# EAGLE board GPSsd_small (EAGLE 9.6.2)
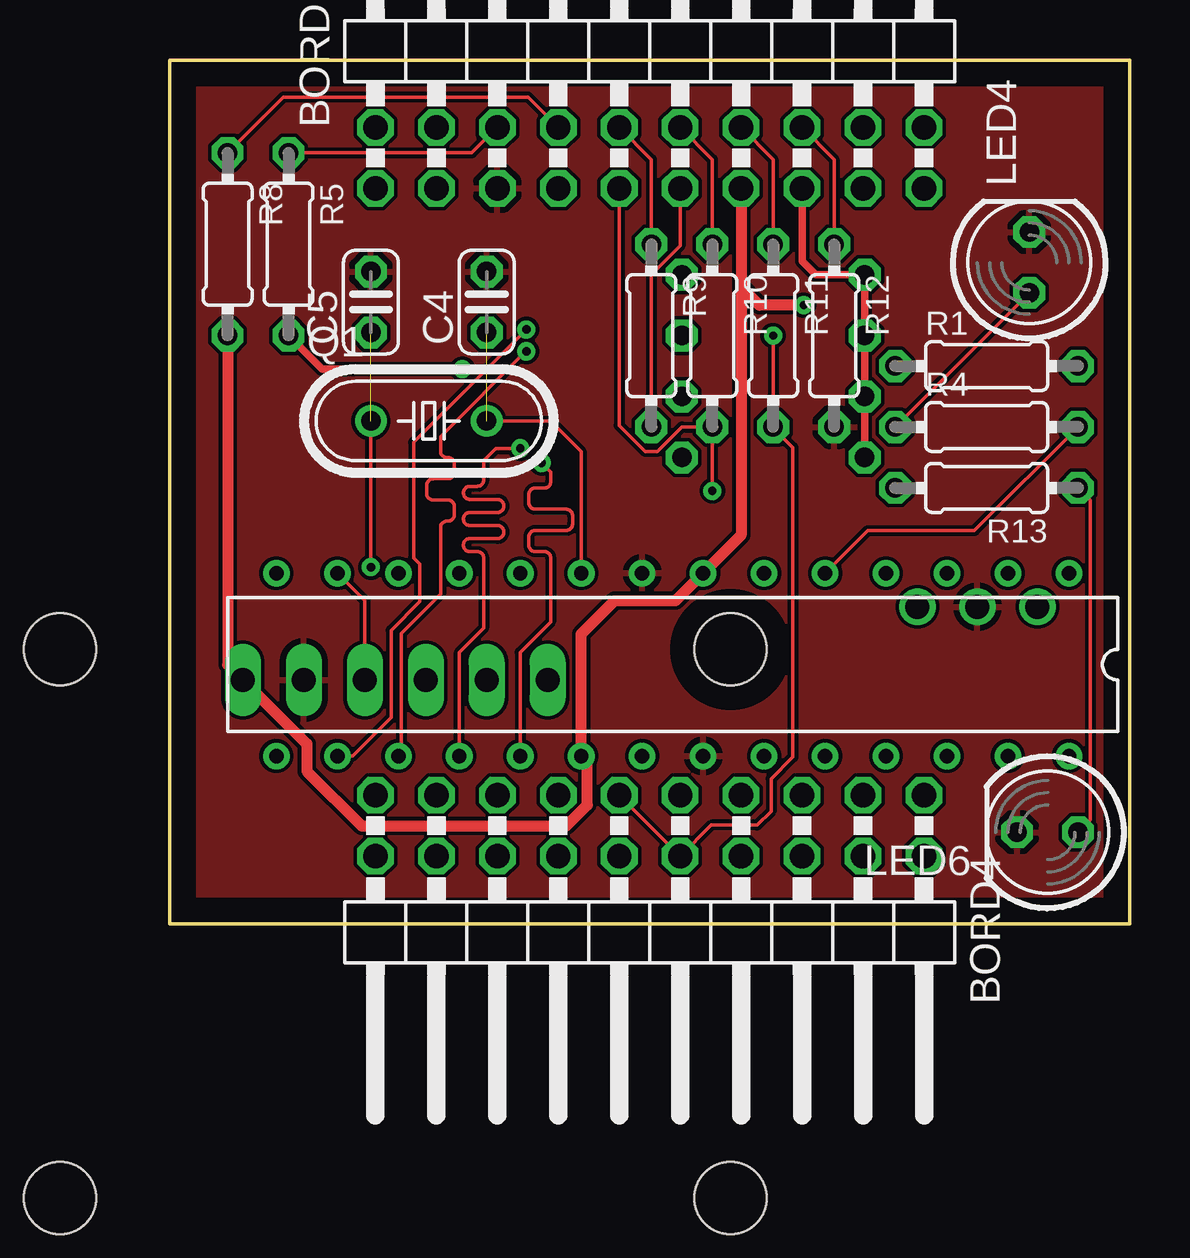
[diagram p0: board, top side]
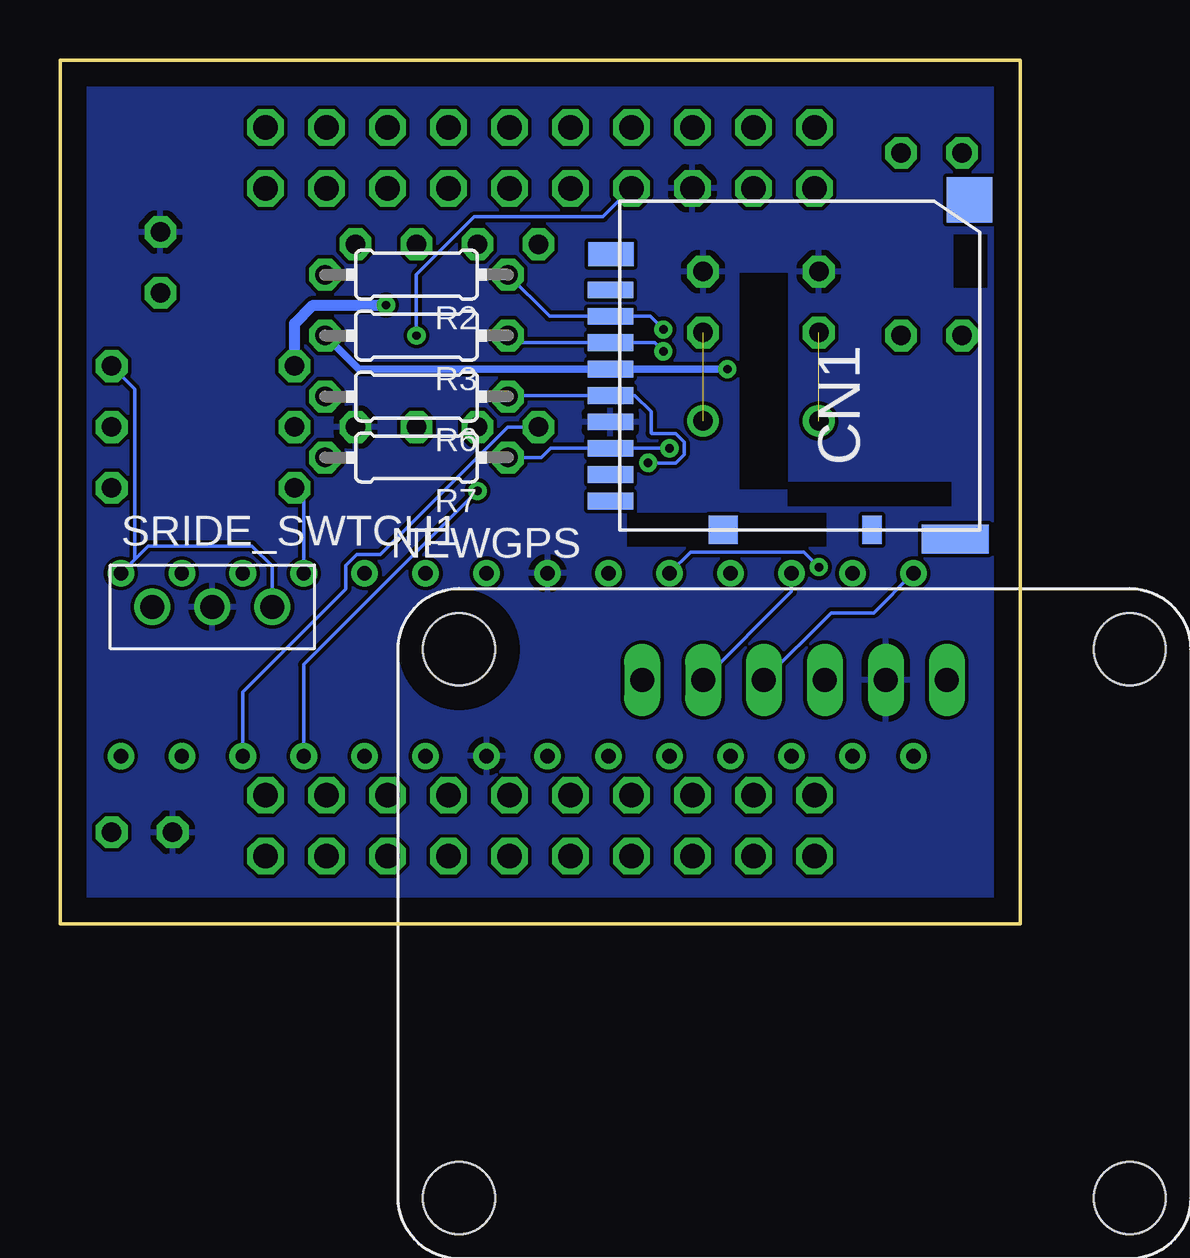
[diagram p1: board, bottom side, seen from below]

Size 40 x 36 mm. Coordinates in mm from the lower left corner, seen from the top.
Outline: 0,0 0,36 40,36 40,0 0,0
Copper layers (1*16): Top 0.035mm / dielectric 1.5mm / Bottom 0.035mm
Design rules "default": minimum track width 6mil, minimum drill 0.35mm, track to track 6mil, track to pad 6mil, pad to pad 6mil, via to via 6mil, smd to smd 6mil, copper to edge 40mil, drill to drill 6mil, minimum pad ring 10mil, minimum via ring 8mil, stop-mask expansion 4mil, vias tented up to drill 0mil, thermal gap 10mil
Net classes: 1 SIGNAL: width 0.152 mm, drill 0.152 mm, clearance 0.152 mm; 2 POWER_H: width 0.457 mm, drill 0.152 mm, clearance 0.152 mm; 3 POWER_L: width 0.305 mm, drill 0.152 mm, clearance 0.152 mm; 4 GND: width 0.305 mm, drill 0.152 mm, clearance 0.152 mm

## Footprints (pad centres in the part's own frame; a part is rotated, then mirrored left to right if it is on the bottom)
2X10/90 = drill 1.016 octagon: 1 -11.43,-6.35; 2 -11.43,-3.81; 3 -8.89,-6.35; 4 -8.89,-3.81; 5 -6.35,-6.35; 6 -6.35,-3.81; 7 -3.81,-6.35; 8 -3.81,-3.81; 9 -1.27,-6.35; 10 -1.27,-3.81; 11 1.27,-6.35; 12 1.27,-3.81; 13 3.81,-6.35; 14 3.81,-3.81; 15 6.35,-6.35; 16 6.35,-3.81; 17 8.89,-6.35; 18 8.89,-3.81; 19 11.43,-6.35; 20 11.43,-3.81
C025-024X044 = drill 0.813 octagon: 1 -1.27,0; 2 1.27,0
DM3AT = smd 0.7 x 1.9: CD/DAT3 2.2,6.4; CLK -1.1,6.4; CMD 1.1,6.4; DAT0 -3.3,6.4; DAT1 -4.4,6.4; DAT2 3.3,6.4; DET_B -5.5,6.4; VDD 0,6.4; VSS -2.2,6.4 | smd 1.2 x 0.8: DET_A -6.7,-4.5 | smd 1 x 1.9: P$9 4.8,6.381 | smd 1.2 x 1.2: P$11 -6.7,1.7 | smd 1.2 x 2.8: P$13 -7.081,-7.973 | smd 1.9 x 1.9: P$14 7.054,-8.562
LED5MM = drill 0.813 octagon: A -1.27,0; K 1.27,0
HC49/S = drill 0.813: 1 -2.413,0; 2 2.413,0
0204/7 = drill 0.813 octagon: 1 -3.81,0; 2 3.81,0
SRIDE_SWITCH = drill 1: L -2.5,0; LR 0,0; R 2.5,0
ATMEGA328P = drill 0.6: AREF 17.78,7.62; AVCC 20.32,7.62; D1TX 5.08,0; D2 7.62,0; D3 10.16,0; D4 12.7,0; D5 25.4,0; D6 27.94,0; D7 30.48,0; D8 33.02,0; D9 33.02,7.62; D14 12.7,7.62; D15 10.16,7.62; D16 7.62,7.62; D17 5.08,7.62; GND1 17.78,0; GND2 15.24,7.62; MISOD12 25.4,7.62; MOSID11 27.94,7.62; PB6 20.32,0; PB7 22.86,0; RESET 0,0; RXD0 2.54,0; SCKD13 22.86,7.62; SCLD19 0,7.62; SDAD18 2.54,7.62; SSD10 30.48,7.62; VCC 15.24,0
NEWGPS = drill 1 long: 5V 10.16,-24.13; EN 22.86,-24.13; GND 12.7,-24.13; RST 20.32,-24.13; RX 17.78,-24.13; TX 15.24,-24.13 | hole 3: 2.54,-2.54; 30.48,-2.54; 30.48,-25.4; 2.54,-25.4

## Placement (x,y rotation side)
BORD1  [2X10/90]  20,37 0 top
BORD4  [2X10/90]  20,-1 180 top
C4  22p  [C025-024X044]  13.21,25.91 90 top
C5  22p  [C025-024X044]  8.38,25.91 90 top
CN1  DM3AT  [DM3AT]  10.67,23.11 90 bottom
LED4  [LED5MM]  35.81,27.56 90 top
LED6  [LED5MM]  36.58,3.81 180 top
Q1  16mhz  [HC49/S]  10.79,20.95 0 top
R1  [0204/7]  34.04,23.24 0 top
R2  10k  [0204/7]  25.15,27.05 180 bottom
R3  10k  [0204/7]  25.15,24.51 180 bottom
R4  100  [0204/7]  34.04,20.7 0 top
R5  [0204/7]  4.95,28.32 270 top
R6  10k  [0204/7]  25.15,21.97 180 bottom
R7  10k  [0204/7]  25.15,19.43 180 bottom
R8  [0204/7]  2.41,28.32 270 top
R9  [0204/7]  20.07,24.51 270 top
R10  [0204/7]  22.61,24.51 270 top
R11  [0204/7]  25.15,24.51 270 top
R12  [0204/7]  27.69,24.51 270 top
R13  100  [0204/7]  34.04,18.16 180 top
SRIDE_SWTCH1  SRIDE_SWITCH  [SRIDE_SWITCH]  33.66,13.21 0 bottom
U$1  ATMEGA238P  [ATMEGA328P]  37.47,14.61 180 top
U$2  NEWGPS  [NEWGPS]  -7.11,-13.97 180 bottom

## Library data of the parts
BORD1 BORD4 = pinhead
C4 C5 = rcl; SPICEPREFIX: C
CN1 = microSD
LED4 LED6 = led
Q1 = crystal; OC_FARNELL: 1667008; OC_NEWARK: unknown
R1-R13 = rcl; SPICEPREFIX: R
SRIDE_SWTCH1 = Sride Switch
U$1 = atmega328p
U$2 = New_GPS

## Nets
+3V3 [POWER_L]: BORD1.15 CN1.VDD R2.2 R3.2 R5.2 R6.2 R7.2
+5V [POWER_H]: BORD1.13 R1.1 R8.2 U$1.AVCC U$1.VCC U$2.5V
BORDRX [SIGNAL]: BORD1.11 R9.2 U$1.D17
BORDTX [SIGNAL]: BORD1.9 R10.2 U$1.D16
CLK [SIGNAL]: CN1.CLK R6.1 U$1.SCKD13
GND [GND]: BORD1.5 C4.2 C5.2 CN1.VSS LED4.K LED6.K R12.2 SRIDE_SWTCH1.LR U$1.GND1 U$1.GND2 U$2.GND
GPSRX [SIGNAL]: U$1.D7 U$2.TX
GPSTX [SIGNAL]: U$1.D8 U$2.RX
LED1.0 [SIGNAL]: R13.2 U$1.D2
LED1.1 [SIGNAL]: R4.2 U$1.D3
N$1 [SIGNAL]: LED6.A R13.1
N$2 [SIGNAL]: BORD1.6 R5.1
N$3 [SIGNAL]: BORD1.8 R8.1
N$4 [SIGNAL]: BORD1.10 R9.1
N$5 [SIGNAL]: C5.1 Q1.1 U$1.PB7
N$6: R1.2 SRIDE_SWTCH1.R U$1.RESET
N$7 [SIGNAL]: C4.1 Q1.2 U$1.PB6
N$8 [SIGNAL]: BORD1.12 R10.1
N$9 [SIGNAL]: BORD1.14 R11.1
N$10 [SIGNAL]: BORD1.16 R12.1
N$11 [SIGNAL]: LED4.A R4.1
N$15 [SIGNAL]: U$2.EN
RST [SIGNAL]: U$1.D6 U$2.RST
SD-MISO [SIGNAL]: CN1.DAT0 R7.1 U$1.MISOD12
SD-MOSI [SIGNAL]: CN1.CMD R3.1 U$1.MOSID11
SD-SS [SIGNAL]: CN1.CD/DAT3 R2.1 U$1.SSD10
SERVO [SIGNAL]: BORD1.7 BORD4.10 BORD4.11 R11.2

## Tracks (layer width: path | path; a pad name or v marks a point on that pad's centre or on a via)
+3V3  (via drill 0.35)
  Top 0.305: R7.2 R6.2 R3.2 R2.2 26.92,27.05 26.35,27.62 BORD1.15 | R5.2 6.35,23.11 v12.19,23.11
  Bottom 0.305: R3.2 27.56,23.11 CN1.VDD v12.19,23.11
+5V  (via drill 0.35)
  Top 0.457: BORD1.13 23.81,26.54 | 23.81,26.54 23.81,16.19 U$1.VCC 21.08,13.46 18.54,13.46 17.14,12.06 U$1.AVCC 17.4,6.73 17.4,4.94 16.52,4.06 8,4.06 5.71,6.35 5.71,7.49 U$2.5V 2.41,10.79 R8.2 | v26.42,25.78 24.57,25.78 23.81,26.54
  Bottom 0.457: R1.1 30.23,25.02 29.46,25.78 v26.42,25.78
BORDRX
  Top 0.152: BORD1.11 21.27,28.25 20.07,27.05 R9.2
  Bottom 0.152: U$1.D17 32.38,9.65 28.09,13.95 28.09,14.93 27.63,15.39 26.67,15.39 26.65,15.39 21.34,20.7 R9.2
BORDTX  (via drill 0.35)
  Top 0.152: BORD1.9 18.73,20.77 19.81,19.68 20.32,19.68 21.34,20.7 R10.2 v22.61,18.03
  Bottom 0.152: v22.61,18.03 29.84,10.79 U$1.D16
CLK  (via drill 0.35)
  Top 0.152: U$1.SCKD13 14.61,11.3 15.88,12.57 15.88,15.24 arc90 15.61,15.51 15.23,15.51 arc-90 14.96,15.77 14.96,16.12 arc-90 15.23,16.39 16.52,16.39 arc90 16.79,16.66 16.79,17.01 arc90 16.52,17.27 15.23,17.27 arc-90 14.96,17.54 14.96,17.89 arc-90 15.23,18.16 15.61,18.16 arc90 15.88,18.42 15.88,18.83 v15.49,19.21
  Bottom 0.152: R6.1 21.29,22.01 CN1.CLK 16.05,22.01 15.37,21.34 15.37,20.45 15.34,20.42 14.35,20.42 14,20.06 14,19.56 14.35,19.2 14.86,19.2 14.86,19.21 v15.49,19.21
GND
  pour Top: -7.62,-10.16 -7.62,38.1 2.54,48.26 38.1,48.26 44.45,41.91 49.53,36.83 49.53,-6.35 40.64,-15.24 -1.27,-15.24 -2.54,-15.24
  pour Bottom: -7.62,38.1 2.54,48.26 38.1,48.26 49.53,36.83 49.53,-6.35 40.64,-15.24 -2.54,-15.24 -7.62,-10.16
GPSRX
  Top 0.152: U$1.D7 8.13,13.46 U$2.TX
GPSTX
  Bottom 0.152: U$1.D8 6.1,12.95 7.87,12.95 U$2.RX
LED1.0
  Bottom 0.152: U$1.D2 29.84,17.78 R13.2
LED1.1
  Top 0.152: U$1.D3 29.08,16.38 33.53,16.38 R4.2
N$1
  Top 0.152: R13.1 38.35,17.65 38.35,4.32 LED6.A
N$2
  Top 0.152: R5.1 12.59,32.13 BORD1.6
N$3
  Top 0.152: R8.1 4.73,34.45 14.93,34.45 BORD1.8
N$4
  Top 0.152: BORD1.10 20.07,31.85 R9.1
N$5  (via drill 0.35)  (1 unrouted)
  Top 0.152: v8.38,14.86 Q1.1
  Bottom 0.152: U$1.PB7 13.72,15.49 9.02,15.49 v8.38,14.86
N$6
  Bottom 0.152: SRIDE_SWTCH1.R 31.16,14.9 32,15.75 36.32,15.75 36.89,15.18 | 36.89,15.18 U$1.RESET | R1.2 36.89,22.29 36.89,15.18
N$7  (1 unrouted)
  Top 0.152: Q1.2 15.88,20.95 17.14,19.68 U$1.PB6
N$8
  Top 0.152: BORD1.12 22.61,31.85 R10.1
N$9
  Top 0.152: BORD1.14 25.15,31.85 R11.1
N$10
  Top 0.152: BORD1.16 27.69,31.85 R12.1
N$11
  Top 0.152: R4.1 LED4.A
RST
  Bottom 0.152: U$2.RST 9.53,13.84 U$1.D6
SD-MISO  (via drill 0.35)
  Top 0.152: U$1.MISOD12 12.06,11.3 13.08,12.32 13.08,15.24 arc90 12.81,15.51 12.5,15.51 arc-90 12.24,15.77 12.24,15.78 arc-90 12.5,16.05 13.66,16.05 arc90 13.93,16.32 13.93,16.33 arc90 13.66,16.59 12.5,16.59 arc-90 12.24,16.86 12.24,16.87 arc-90 12.5,17.14 13.66,17.14 arc90 13.93,17.41 13.93,17.42 arc90 13.66,17.68 12.5,17.68 arc-90 12.24,17.95 12.24,17.96 arc-90 12.5,18.23 12.81,18.23 arc90 13.08,18.5 13.08,19.3 13.59,19.81 v14.61,19.81
  Bottom 0.152: R7.1 19.94,19.43 19.56,19.81 CN1.DAT0 v14.61,19.81
SD-MOSI  (via drill 0.35)
  Top 0.152: U$1.MOSID11 9.65,7.11 9.65,12.1 11.28,13.73 11.28,16.51 arc-90 11.55,16.78 11.59,16.78 arc90 11.86,17.04 11.86,17.39 arc90 11.59,17.66 10.98,17.66 arc-90 10.71,17.93 10.71,18.28 arc-90 10.98,18.54 11.59,18.54 arc90 11.86,18.81 11.86,19.16 arc90 11.59,19.43 11.55,19.43 arc-90 11.28,19.69 11.28,20.3 14.86,23.88 v14.86,23.86
  Bottom 0.152: R3.1 21.04,24.21 CN1.CMD 15.22,24.21 v14.86,23.86
SD-SS  (via drill 0.35)
  Top 0.152: U$1.SSD10 7.62,6.99 9.22,8.59 9.22,12.23 10.41,13.42 10.41,14.99 10.16,15.24 10.16,20.07 v14.86,24.77
  Bottom 0.152: R2.1 19.6,25.31 CN1.CD/DAT3 15.41,25.31 v14.86,24.77
SERVO  (via drill 0.35)
  Top 0.152: BORD4.11 BORD4.10 22.57,4.11 24.47,4.11 25.05,4.69 25.05,6.04 25.96,6.95 25.96,19.85 25.15,20.66 R11.2 v25.15,24.51
  Bottom 0.152: v25.15,24.51 25.15,27.05 22.73,29.46 17.38,29.46 BORD1.7